# Altium PCB LCDTestor_CPLD.PcbDoc (part 2 of 2)
Units mil, origin at the board's own origin, x right, y up, seen from the top; angles counter-clockwise.
Board outline 5780 x 4745 mil, 2 copper layers (Top Layer, Bottom Layer); 142 components, 172 nets, 608 pads, 189 vias.
Unrouted connection lines stored in the file: 2.
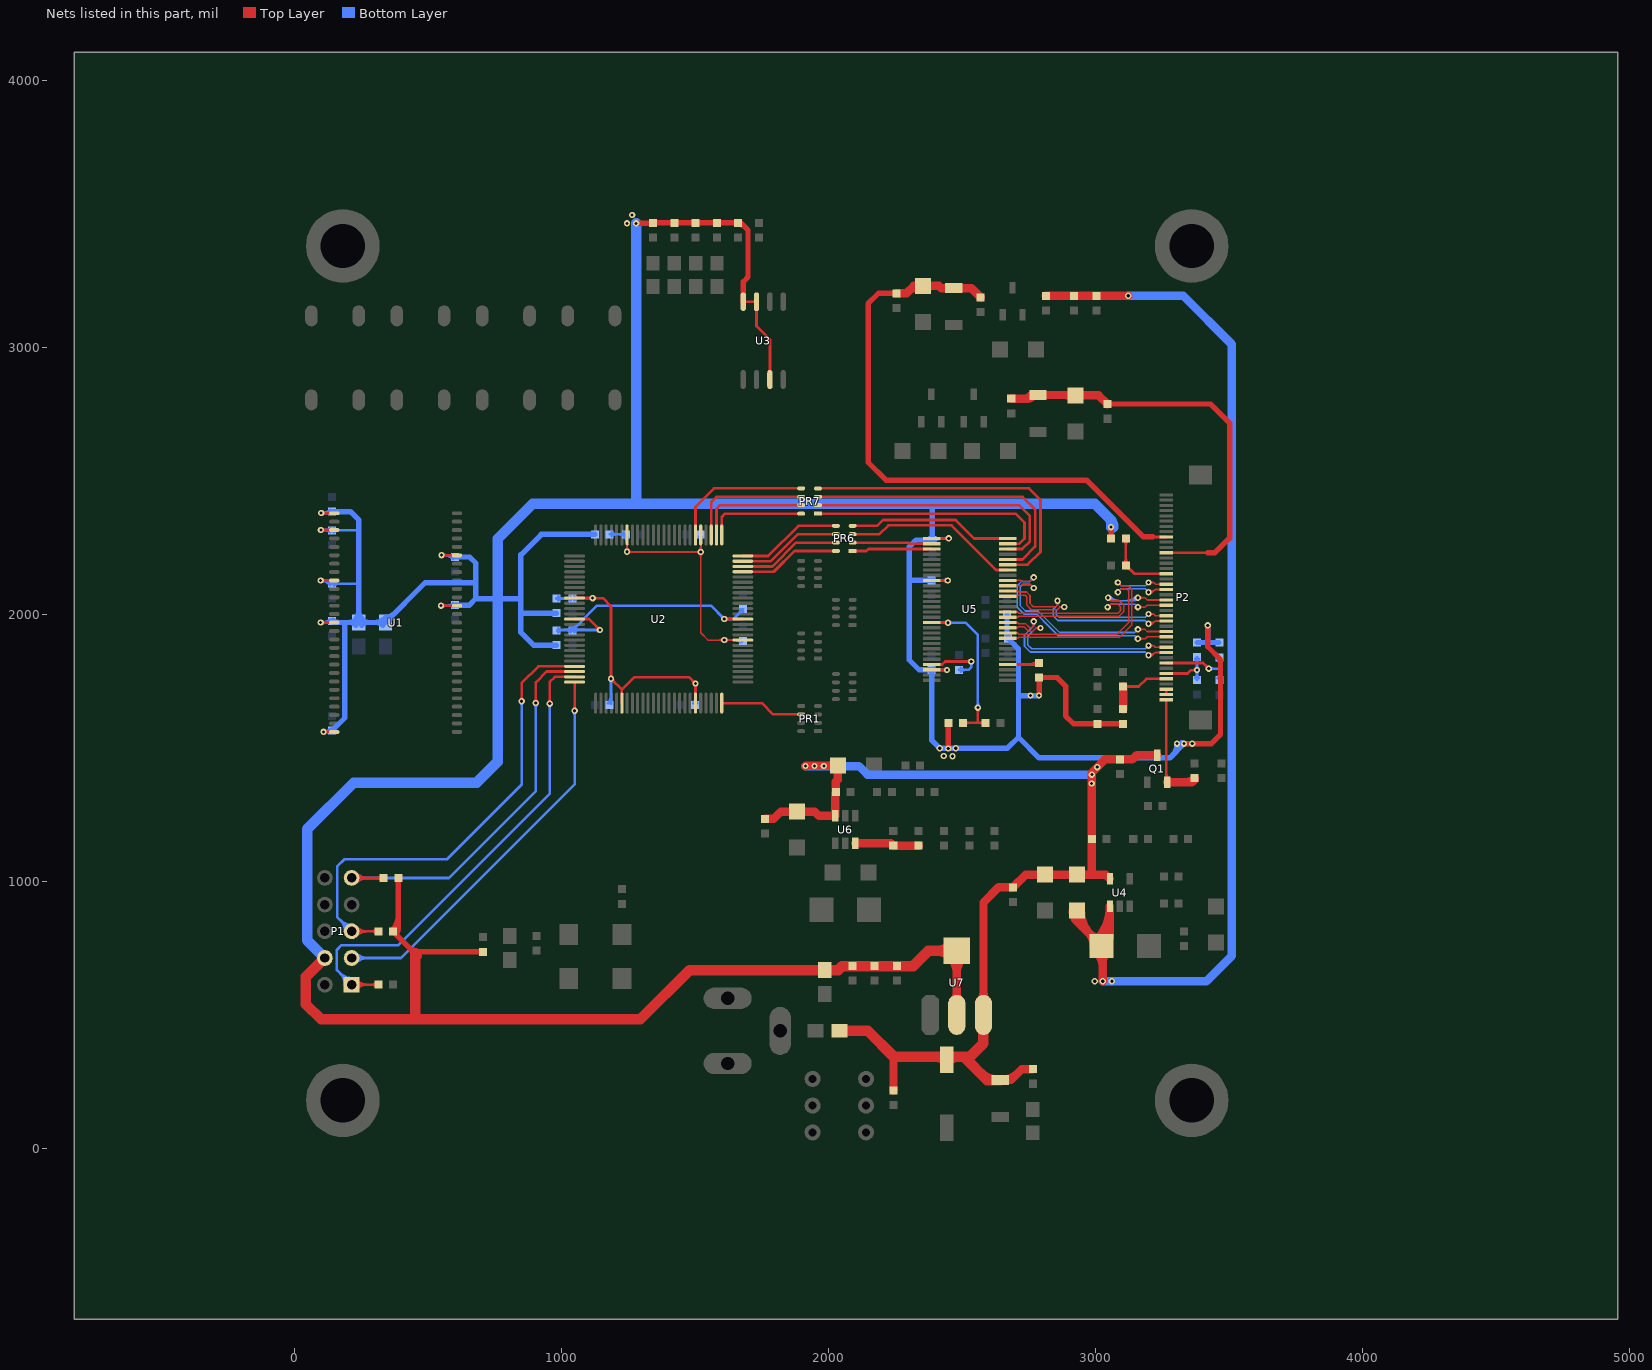
[diagram p2: the nets of this part, all layers, seen from the top]

## Via types
v1: diameter 23.62, hole 11.81, Top Layer to Bottom Layer, 165 vias
v2: diameter 50, hole 28, Top Layer to Bottom Layer, 24 vias

## Nets (pads, with @x,y where several pads share a name; then routed paths per layer and width w, separated by ;. In a path a pad name is that pad's centre, name@x,y a point inside that pad or via, vN(x,y) a via of type N, cw(c..) or ccw(c..) an arc to the next point about the centre after c; other vN are vias at no path point) (continued)
NetR35_2: R35.2 R43.1 U5.17 | length 785.9
  Top Layer w10: U5.17@2385.67,1969.79 2446.21,1969.79 v1(2447,1969) ; 2428.66,1969.79 cw(c2428.66,1950.66) v1@2442.18,1964.18 ; 2432.46,1969.79 ccw(c2432.46,1983.54) v1@2442.18,1973.82 ; R35.2@2503.39,1594 R43.1@2588.39,1594 ; R35.2@2510.46,1586.93 cw(c2527.53,1569.86) 2527.53,1594 cw(c2527.53,1618.14) R35.2@2510.46,1601.07 ; v1@2554.18,1646.18 cw(c2542.56,1634.56) 2559,1634.56 cw(c2575.44,1634.56) v1@2563.82,1646.18 ; 2559,1594 v1(2559,1651) ; R43.1@2581.31,1586.93 ccw(c2564.24,1569.86) 2564.24,1594 ccw(c2564.24,1618.14) R43.1@2581.31,1601.07
  Bottom Layer w10: v1(2447,1969) 2513,1969 2559,1923 v1(2559,1651) ; v1@2451.82,1964.18 cw(c2463.44,1952.56) 2463.44,1969 cw(c2463.44,1985.44) v1@2451.82,1973.82 ; v1@2554.18,1655.82 ccw(c2542.56,1667.44) 2559,1667.44 ccw(c2575.44,1667.44) v1@2563.82,1655.82
NetR36_2: R36.2 U5.25 | length 314.3
  Top Layer w10: U5.25@2385.67,1812.31 2425.31,1812.31 2437,1824 v1(2534,1824) ; v1@2529.18,1819.18 ccw(c2517.56,1807.56) 2517.56,1824 ccw(c2517.56,1840.44) v1@2529.18,1828.82
  Bottom Layer w10: R36.2@2488.39,1792.62 2524.62,1792.62 2534,1802 v1(2534,1824) ; R36.2@2495.46,1785.55 cw(c2512.53,1768.48) 2512.53,1792.62 cw(c2512.53,1816.76) R36.2@2495.46,1799.69 ; v1@2529.18,1819.18 cw(c2517.56,1807.56) 2534,1807.56 cw(c2550.44,1807.56) v1@2538.82,1819.18
NetR38_1: R38.1 R44.2 U6.3 | length 263.5
  Top Layer w31.5: U6.3@2099.4,1142.82 2233.18,1142.82 R44.2@2242,1134 R38.1@2337,1134 ; 2222.51,1142.82 cw(c2222.51,1114.51) R44.2@2242.53,1134.53
NetR46_2: R46.2 U5.32 | length 174.9
  Top Layer w10: U5.32@2671.1,1812.31 2781.69,1812.31 R46.2@2788.39,1819 cw(c2772.23,1835.16) 2772.23,1812.31 ; 2748.09,1812.31 ccw(c2748.09,1859.3) R46.2@2781.31,1826.07
R0: PR7.5 U2.81 | length 530.1
  Top Layer w10: U2.81@1501.14,2297.74 1501.14,2403.14 1570.07,2472.07 PR7.5@1897.24,2472.07
R1: PR7.6 U2.78 | length 468.3
  Top Layer w10: U2.78@1560.2,2297.74 1560.2,2420.81 1579.96,2440.57 1623.39,2440.57 PR7.6@1897.24,2440.57
R2: PR7.7 U2.77 | length 420.7
  Top Layer w10: U2.77@1579.88,2297.74 1579.88,2395.5 1593.46,2409.08 1633.39,2409.08 PR7.7@1897.24,2409.08
R3: PR7.8 U2.76 | length 370.1
  Top Layer w10: U2.76@1599.57,2297.74 1599.57,2365.18 1611.97,2377.58 1766.97,2377.58 PR7.8@1897.13,2377.58
R4: PR6.5 U2.75 | length 395.8
  Top Layer w10: U2.75@1678.31,2219 1773.39,2219 1886.46,2332.07 PR6.5@2027.24,2332.07
R5: PR6.8 U2.72 | length 381
  Top Layer w10: U2.72@1678.31,2159.94 1794.33,2159.94 1871.97,2237.58 PR6.8@2027.13,2237.58
R6: PR6.6 U2.74 | length 390.9
  Top Layer w10: U2.74@1678.31,2199.32 1783.7,2199.32 1884.96,2300.57 PR6.6@2027.24,2300.57
R7: PR6.7 U2.73 | length 386
  Top Layer w10: U2.73@1678.31,2179.63 1789.02,2179.63 1878.46,2269.08 PR6.7@2027.24,2269.08
R_0: PR7.4 U5.51 | length 1188.1
  Top Layer w10: PR7.4@1960.12,2472.07 2750.32,2472.07 2793.39,2429 2793.39,2234 2745.71,2186.32 U5.51@2671.1,2186.32
R_1: PR7.3 U5.52 | length 1094.7
  Top Layer w10: PR7.3@1960.12,2440.57 2726.81,2440.57 2773.39,2394 2773.39,2254 2725.39,2206.01 U5.52@2671.1,2206.01
R_2: PR7.2 U5.54 | length 999
  Top Layer w10: PR7.2@1960.12,2409.08 2713.31,2409.08 2753.39,2369 2753.39,2274 2724.76,2245.38 U5.54@2671.1,2245.38
R_3: PR7.1 U5.55 | length 917.3
  Top Layer w10: PR7.1@1960.12,2377.58 2699.8,2377.58 2733.39,2344 2733.39,2284 2714.45,2265.06 U5.55@2671.1,2265.06
R_4: PR6.4 U5.56 | length 618.8
  Top Layer w10: PR6.4@2090.12,2332.07 2181.46,2332.07 2203.39,2354 2476,2354 2545.25,2284.75 U5.56@2671.1,2284.75
R_5: PR6.1 U5.3 | length 298.8
  Top Layer w10: PR6.1@2090.12,2237.58 2141.97,2237.58 2149.76,2245.38 U5.3@2385.67,2245.38
R_6: PR6.3 U5.50 | length 664.2
  Top Layer w10: PR6.3@2090.12,2300.57 2189.96,2300.57 2223.39,2334 2460,2334 2627.36,2166.64 U5.50@2671.1,2166.64
R_7: PR6.2 U5.2 | length 297.2
  Top Layer w10: PR6.2@2090.12,2269.08 2298.31,2269.08 2302.32,2265.06 U5.2@2385.67,2265.06
RESET: C34.2 P2.5 R21.2 | length 296.3
  Top Layer w10: C34.2@3103,1730 3161,1730 3189.88,1758.88 P2.5@3264.41,1758.88 ; C34.2@3110.07,1722.93 cw(c3127.14,1705.86) 3127.14,1730 cw(c3127.14,1754.14) C34.2@3110.07,1737.07
  Top Layer w31.5: R21.2@3103,1645 C34.2@3103,1730
RXCLKIN_N: P2.10 U5.40 | length 911.3
  Top Layer w5.91: U5.40@2671.1,1969.79 2707.39,1969.79 2707.39,1969.04 2710.57,1965.85 2737.54,1965.85 2753.39,1950 2761.39,1950 2767.39,1956 2767.39,1973 v1(2768.39,1974) ; U5.40@2699.77,1967.7 cw(c2704.81,1962.66) 2704.81,1969.79 cw(c2704.81,1976.92) U5.40@2699.77,1971.87 ; v1@2762.36,1967.51 cw(c2751.64,1955.97) 2767.39,1955.97 cw(c2779.94,1955.97) v1@2773.17,1966.54 ; v1@3196.91,1844.4 ccw(c3203.38,1855.58) 3212.52,1846.44 ; v1(3198.39,1846.95) 3213.03,1846.95 3223.39,1857.31 ; v1@3199.87,1849.51 ccw(c3207.37,1862.45) 3217.95,1851.87 ; v1@3202.83,1854.62 ccw(c3211.36,1869.33) 3223.39,1857.31 ; P2.10@3242.64,1855.22 ccw(c3237.6,1850.18) 3237.6,1857.31 ccw(c3237.6,1864.43) P2.10@3242.64,1859.39 ; P2.10@3264.41,1857.31 3223.39,1857.31
  Top Layer w10: U5.40@2671.1,1969.79 U5.40@2671.1,1970.1
  Bottom Layer w5.91: v1@2763.44,1966.65 cw(c2757.17,1957.35) 2768.39,1957.35 ; v1(2768.39,1974) 2768.39,1957.35 ; v1@2773.33,1966.65 ccw(c2779.6,1957.35) 2768.39,1957.35 ; v1(3198.39,1846.95) 3186.14,1859.2 2755.49,1859.2 2733.75,1880.93 2733.75,1922.72 2768.39,1957.35
RXCLKIN_P: P2.11 U5.39 | length 854.2
  Top Layer w5.91: U5.39@2671.1,1950.1 2707.39,1950.1 2711.32,1954.04 2731.35,1954.04 2737.39,1948 2748.39,1937 2765.39,1937 2777.39,1949 ; U5.39@2699.77,1948.01 cw(c2704.81,1942.97) 2704.81,1950.1 cw(c2704.81,1957.23) U5.39@2699.77,1952.19 ; v1@2785.88,1944.3 ccw(c2777.39,1938.98) 2777.39,1949 ; v1@2785.88,1953.7 cw(c2777.39,1959.02) 2777.39,1949 ; v1(2793.39,1949) 2777.39,1949 ; v1(3198.39,1883.25) 3217.44,1883.25 ; v1@3205.16,1877.54 cw(c3217.44,1867.19) 3217.44,1883.25 ; v1@3205.16,1888.96 ccw(c3217.44,1899.31) 3217.44,1883.25 ; P2.11@3242.64,1874.9 ccw(c3237.6,1869.86) 3237.6,1876.99 ccw(c3237.6,1884.12) P2.11@3242.64,1879.08 ; P2.11@3264.41,1876.99 3223.7,1876.99 3217.44,1883.25
  Top Layer w10: P2.11@3264.41,1876.99 P2.11@3264.41,1877.31
  Bottom Layer w5.91: v1@2786.04,1944.05 ccw(c2776.74,1937.79) 2776.74,1949 ; v1@2786.04,1953.95 cw(c2776.74,1960.21) 2776.74,1949 ; v1(2793.39,1949) 2776.74,1949 ; v1(3198.39,1883.25) 3186.14,1871.01 2760.38,1871.01 2745.56,1885.82 2745.56,1917.82 2776.74,1949
RXIN0_N: P2.13 U5.48 | length 962.6
  Top Layer w5.91: U5.48@2671.1,2127.27 2720.12,2127.27 2723.39,2124 2753.39,2124 v1(2768.39,2139) ; U5.48@2699.77,2125.18 cw(c2704.81,2120.14) 2704.81,2127.27 cw(c2704.81,2134.4) U5.48@2699.77,2129.36 ; v1(3158.39,1909) 3186.34,1909 3193.7,1916.36 P2.13@3264.41,1916.36 ; v1@3164.65,1902.74 cw(c3179.77,1887.61) 3179.77,1909 cw(c3179.77,1930.39) v1@3164.65,1915.26 ; P2.13@3242.64,1914.27 ccw(c3237.6,1909.23) 3237.6,1916.36 ccw(c3237.6,1923.49) P2.13@3242.64,1918.45
  Top Layer w10: U5.48@2671.1,2127.27 U5.48@2671.1,2127.58 ; P2.13@3264.41,1916.05 P2.13@3264.41,1916.36
  Bottom Layer w5.91: v1@2759.53,2139 cw(c2738.14,2139) 2753.26,2123.88 cw(c2768.39,2108.76) v1@2768.39,2130.14 ; v1(2768.39,2139) 2752.39,2123 2726.57,2123 2727.39,2123.81 2722.49,2123.81 2706.57,2107.89 2706.57,2027.11 2733.03,2000.65 2780.03,2000.65 2826.57,1954.11 2860.09,1920.59 3146.79,1920.59 v1(3158.39,1909)
RXIN0_P: P2.14 U5.47 | length 886
  Top Layer w5.91: U5.47@2671.1,2107.58 2719.97,2107.58 2724.39,2112 2755.39,2112 v1(2768.39,2099) ; U5.47@2699.77,2105.5 cw(c2704.81,2100.45) 2704.81,2107.58 cw(c2704.81,2114.71) U5.47@2699.77,2109.67 ; v1(3158.39,1944) 3185.43,1944 3193.39,1936.05 P2.14@3264.41,1936.05 ; v1@3164.65,1937.74 cw(c3179.77,1922.61) 3179.77,1944 cw(c3179.77,1965.39) v1@3164.65,1950.26 ; P2.14@3242.64,1933.96 ccw(c3237.6,1928.92) 3237.6,1936.05 ccw(c3237.6,1943.17) P2.14@3242.64,1938.13
  Bottom Layer w5.91: v1(2768.39,2099) 2755.39,2112 2727.39,2112 2718.39,2103 2718.39,2032 2737.39,2013 2784.39,2013 2864.98,1932.41 3146.79,1932.41 v1(3158.39,1944)
RXIN1_N: P2.16 U5.46 | length 877.7
  Top Layer w5.91: U5.46@2697.49,2087.9 U5.46@2671.1,2087.9 2707.39,2087.9 2711.32,2083.96 2741.28,2083.96 2754.2,2071.04 2754.2,2041.19 2766.39,2029 2851.39,2029 2857.39,2035 ; U5.46@2699.77,2085.81 cw(c2704.81,2080.77) 2704.81,2087.9 cw(c2704.81,2095.03) U5.46@2699.77,2089.99 ; v1@2852.68,2043.49 cw(c2847.37,2035) 2857.39,2035 ; v1(2857.39,2051) 2857.39,2035 ; v1@2862.09,2043.49 ccw(c2867.4,2035) 2857.39,2035 ; v1@3196.91,1962.51 ccw(c3203.38,1973.69) 3212.52,1964.55 ; v1(3198.39,1965.06) 3213.03,1965.06 3223.39,1975.42 ; v1@3199.87,1967.62 ccw(c3207.37,1980.56) 3217.95,1969.98 ; v1@3202.83,1972.73 ccw(c3211.36,1987.44) 3223.39,1975.42 ; P2.16@3242.64,1973.33 ccw(c3237.6,1968.29) 3237.6,1975.42 ccw(c3237.6,1982.54) P2.16@3242.64,1977.5 ; P2.16@3264.41,1975.42 3223.39,1975.42
  Top Layer w10: U5.46@2671.1,2087.9 U5.46@2671.1,2088.21
  Bottom Layer w5.91: v1(2857.39,2051) 2857.39,2035.33 2841.22,2019.17 2841.22,1994.46 2858.38,1977.31 3186.14,1977.31 v1(3198.39,1965.06)
RXIN1_P: P2.17 U5.45 | length 783.1
  Top Layer w5.91: U5.45@2671.1,2068.21 2707.39,2068.21 2711.32,2072.15 2736.39,2072.15 2742.39,2066.15 2742.39,2035 2759.39,2018 2857.39,2018 2867.39,2028 v1(2882.39,2028) v1@2881.53,2027.14 ; U5.45@2699.77,2066.13 cw(c2704.81,2061.08) 2704.81,2068.21 cw(c2704.81,2075.34) U5.45@2699.77,2070.3 ; v1(3198.39,2001.36) 3217.44,2001.36 ; v1@3205.16,1995.65 cw(c3217.44,1985.3) 3217.44,2001.36 ; v1@3205.16,2007.07 ccw(c3217.44,2017.42) 3217.44,2001.36 ; P2.17@3242.64,1993.01 ccw(c3237.6,1987.97) 3237.6,1995.1 ccw(c3237.6,2002.23) P2.17@3242.64,1997.19 ; P2.17@3264.41,1995.1 3223.7,1995.1 3217.44,2001.36
  Top Layer w10: P2.17@3264.41,1995.1 P2.17@3264.41,1995.42
  Bottom Layer w5.91: v1(2882.39,2028) 2866.76,2028 2853.07,2014.31 2853.07,2000.02 2852.72,1999.67 2863.27,1989.12 3186.14,1989.12 v1(3198.39,2001.36)
RXIN2_N: P2.19 U5.42 | length 787.8
  Top Layer w5.91: U5.42@2671.1,2009.16 2708.39,2009.16 2712.32,2005.22 3084.61,2005.22 3093.39,2014 3093.39,2029 3083.39,2039 3056.56,2039.02 v1(3044.96,2027.43) ; U5.42@2699.77,2007.07 cw(c2704.81,2002.03) 2704.81,2009.16 cw(c2704.81,2016.29) U5.42@2699.77,2011.24 ; v1(3158.39,2027.43) 3186.34,2027.43 3193.39,2034.47 P2.19@3264.41,2034.47 ; v1@3164.65,2021.16 cw(c3179.77,2006.04) 3179.77,2027.43 cw(c3179.77,2048.81) v1@3164.65,2033.69 ; P2.19@3242.64,2032.38 ccw(c3237.6,2027.34) 3237.6,2034.47 ccw(c3237.6,2041.6) P2.19@3242.64,2036.56
  Top Layer w10: P2.19@3264.41,2034.47 P2.19@3264.41,2034.79
  Bottom Layer w5.91: v1(3044.96,2027.43) 3056,2038.46 3147.35,2038.46 v1(3158.39,2027.43)
RXIN2_P: P2.20 U5.41 | length 1023.9
  Top Layer w5.91: U5.41@2671.1,1989.47 2708.39,1989.47 2712.32,1993.41 3087.79,1993.41 3105.2,2010.81 3105.2,2034.02 3088.39,2050.83 3058.41,2050.83 v1(3046.81,2062.43) ; U5.41@2699.77,1987.38 cw(c2704.81,1982.34) 2704.81,1989.47 cw(c2704.81,1996.6) U5.41@2699.77,1991.56 ; v1(3158.39,2062.43) 3185.43,2062.43 3193.7,2054.16 P2.20@3264.41,2054.16 ; v1@3164.65,2056.16 cw(c3179.77,2041.04) 3179.77,2062.43 cw(c3179.77,2083.81) v1@3164.65,2068.69 ; P2.20@3242.64,2052.07 ccw(c3237.6,2047.03) 3237.6,2054.16 ccw(c3237.6,2061.28) P2.20@3242.64,2056.24
  Top Layer w10: U5.41@2671.1,1989.16 U5.41@2671.1,1989.47 ; P2.20@3264.41,2054.16 P2.20@3264.41,2054.47
  Bottom Layer w5.91: v1@3044.72,2060.34 ccw(c3064.85,2080.46) 3064.85,2052 ; v1(3046.81,2062.43) 3057.24,2052 3147.96,2052 v1(3158.39,2062.43) ; v1@3048.9,2064.51 ccw(c3079.11,2094.72) 3079.11,2052 ; v1@3053.07,2068.69 ccw(c3093.36,2108.98) 3093.36,2052 ; 3111.83,2052 ccw(c3111.83,2108.98) v1@3152.12,2068.69 ; 3126.09,2052 ccw(c3126.09,2094.72) v1@3156.3,2064.51 ; 3140.35,2052 ccw(c3140.35,2080.46) v1@3160.47,2060.34
RXIN3_N: P2.22 U5.38 | length 916.7
  Top Layer w5.91: U5.38@2671.1,1930.42 2708.39,1930.42 2712.32,1926.48 3080.87,1926.48 3123.39,1969 3123.39,2089 3116.97,2095.42 3095.63,2095.42 v1(3083.39,2083.17) ; U5.38@2699.77,1928.33 cw(c2704.81,1923.29) 2704.81,1930.42 cw(c2704.81,1937.55) U5.38@2699.77,1932.5 ; v1@3196.91,2080.62 ccw(c3203.38,2091.8) 3212.52,2082.66 ; v1(3198.39,2083.17) 3213.03,2083.17 3223.39,2093.53 ; v1@3199.87,2085.73 ccw(c3207.37,2098.67) 3217.95,2088.09 ; v1@3202.83,2090.84 ccw(c3211.36,2105.55) 3223.39,2093.53 ; P2.22@3242.64,2091.44 ccw(c3237.6,2086.4) 3237.6,2093.53 ccw(c3237.6,2100.65) P2.22@3242.64,2095.61 ; P2.22@3264.41,2093.53 3223.39,2093.53
  Top Layer w10: U5.38@2671.1,1930.42 U5.38@2671.1,1930.73
  Bottom Layer w5.91: v1(3083.39,2083.17) 3096.21,2096 3185.56,2096 v1(3198.39,2083.17)
RXIN3_P: P2.23 U5.37 | length 925.3
  Top Layer w5.91: U5.37@2671.1,1910.73 2708.39,1910.73 2712.32,1914.67 3089.05,1914.67 3135.2,1960.81 3135.2,2094 3121.97,2107.23 3095.63,2107.23 v1(3083.39,2119.47) ; U5.37@2699.77,1908.64 cw(c2704.81,1903.6) 2704.81,1910.73 cw(c2704.81,1917.86) U5.37@2699.77,1912.82 ; v1(3198.39,2119.47) 3217.91,2119.47 ; v1@3205.05,2113.64 cw(c3217.91,2102.38) 3217.91,2119.47 ; v1@3205.05,2125.31 ccw(c3217.91,2136.56) 3217.91,2119.47 ; P2.23@3242.64,2111.12 ccw(c3237.6,2106.08) 3237.6,2113.21 ccw(c3237.6,2120.34) P2.23@3242.64,2115.3 ; P2.23@3264.41,2113.21 3224.17,2113.21 3217.91,2119.47
  Top Layer w10: P2.23@3264.41,2113.21 P2.23@3264.41,2113.53
  Bottom Layer w5.91: v1(3083.39,2119.47) 3094.86,2108 3186.91,2108 v1(3198.39,2119.47)
SELB: P2.25 R31.2 R33.1 | length 377.8
  Top Layer w10: R33.1@3106.31,2191.07 ccw(c3089.24,2208.14) 3113.39,2208.14 ccw(c3137.53,2208.14) R33.1@3120.46,2191.07 ; R31.2@3106.31,2276.93 cw(c3089.24,2259.86) 3113.39,2259.86 cw(c3137.53,2259.86) R31.2@3120.46,2276.93 ; R33.1@3113.39,2174 cw(c3113.39,2149.86) 3130.46,2166.93 cw(c3147.53,2184) R33.1@3123.39,2184 ; R31.2@3113.39,2284 R33.1@3113.39,2184 3144.8,2152.58 P2.25@3264.41,2152.58
STBYB: P2.8 R23.1 R30.2 | length 420.2
  Top Layer w10: P2.8@3264.41,1817.94 3403.06,1817.94 v1(3424,1797) ; v1@3417.19,1797 ccw(c3400.75,1797) 3412.37,1808.63 ccw(c3424,1820.25) v1@3424,1803.81
  Bottom Layer w10: v1(3424,1797) 3463.39,1797 ; v1@3428.82,1792.18 cw(c3440.44,1780.56) 3440.44,1797 cw(c3440.44,1813.44) v1@3428.82,1801.82 ; R30.2@3456.31,1761.07 ccw(c3439.24,1778.14) 3463.39,1778.14 ccw(c3487.53,1778.14) R30.2@3470.46,1761.07 ; R23.1@3456.31,1831.93 cw(c3439.24,1814.86) 3463.39,1814.86 cw(c3487.53,1814.86) R23.1@3470.46,1831.93 ; R30.2@3463.39,1754 3463.39,1797 ; R23.1@3463.39,1839 3463.39,1797
SW: C23.2 C30.1 C36.1 D3.1 L3.2 U4.1@3053.6,906.82 | length 4755.3
  Top Layer w31.5: C36.1@2814,3193 C30.1@2919,3193 C23.2@3004,3193 3121,3193 v1(3122,3194) ; L3.2@2913.76,890.5 ccw(c2971.31,890.5) 2930.61,849.8 ; L3.2@2931,890.5 2931,849.42 D3.1@3022.42,758 D3.1@3026.71,762.29 ; L3.2@2945.25,890.5 ccw(c3078.84,890.5) D3.1@2984.38,796.04 ; D3.1@2992.89,758 ccw(c2921.6,758) 2972.01,808.41 ccw(c3022.42,858.81) D3.1@3022.42,787.53 ; D3.1@3001.54,737.12 cw(c2940.07,675.65) 3027,675.65 ; D3.1@3001.54,778.88 ccw(c2875.85,904.56) U4.1@3053.6,904.56 ; D3.1@3023.81,756.61 ccw(c2951.89,828.53) 3053.6,828.53 ; v1(3027,626) 3027,762 D3.1@3026.71,762.29 ; 3027,697.78 cw(c3082.64,697.78) D3.1@3043.3,737.12 ; U4.1@3053.6,906.82 3053.6,789.18 D3.1@3026.71,762.29 ; 2931,856.09 cw(c2965.41,856.09) 2941.08,880.42 ccw(c2965.41,856.09) 2931,856.09 ; 2931,856.09 ccw(c2896.59,856.09) 2920.92,880.42 cw(c2896.59,856.09) 2931,856.09
  Bottom Layer w31.5: v1(3027,626) 3415,626 3510,721 3510,3012 3328,3194 v1(3122,3194)
  other v1: 2997,626 3061,626
TCK: P1.1 R14.2 U2.24 | length 2198.8
  Top Layer w10: P1.1@213,613 R14.2@313,613 ; P1.1@223.27,602.73 cw(c248.07,577.93) 248.07,613 cw(c248.07,648.07) P1.1@223.27,623.27 ; P1.1@230.34,595.66 cw(c272.21,553.79) 272.21,613 cw(c272.21,672.21) P1.1@230.34,630.34 ; R14.2@305.93,605.93 ccw(c288.86,588.86) 288.86,613 ccw(c288.86,637.14) R14.2@305.93,620.07 ; v1@950.18,1670.82 ccw(c938.56,1682.44) 955,1682.44 ccw(c971.44,1682.44) v1@959.82,1670.82 ; v1(955,1666) 955,1747 974.24,1766.24 U2.24@1048.39,1766.24
  Bottom Layer w10: P1.1@188.47,613 ccw(c129.26,613) 171.13,654.87 ccw(c213,696.74) P1.1@213,637.53 ; P1.1@198.47,613 ccw(c163.4,613) 188.2,637.8 ccw(c213,662.6) P1.1@213,627.53 ; P1.1@213,613 158,668 158,744 175,761 388,761 955,1328 v1(955,1666) ; v1@950.18,1661.18 cw(c938.56,1649.56) 955,1649.56 cw(c971.44,1649.56) v1@959.82,1661.18
TDI: P1.9 R13.2 U2.23 | length 1899.8
  Top Layer w10: P1.9@213,1013 R13.2@333,1013 ; P1.9@223.27,1002.73 cw(c248.07,977.93) 248.07,1013 cw(c248.07,1048.07) P1.9@223.27,1023.27 ; P1.9@230.34,995.66 cw(c272.21,953.79) 272.21,1013 cw(c272.21,1072.21) P1.9@230.34,1030.34 ; R13.2@325.93,1005.93 ccw(c308.86,988.86) 308.86,1013 ccw(c308.86,1037.14) R13.2@325.93,1020.07 ; v1@898.18,1672.82 ccw(c886.56,1684.44) 903,1684.44 ccw(c919.44,1684.44) v1@907.82,1672.82 ; v1(903,1668) 903,1745 943.93,1785.93 U2.23@1048.39,1785.93
  Bottom Layer w10: P1.9@213,1013 578,1013 903,1338 v1(903,1668) ; P1.9@223.27,1002.73 cw(c248.07,977.93) 248.07,1013 cw(c248.07,1048.07) P1.9@223.27,1023.27 ; P1.9@230.34,995.66 cw(c272.21,953.79) 272.21,1013 cw(c272.21,1072.21) P1.9@230.34,1030.34 ; v1@898.18,1663.18 cw(c886.56,1651.56) 903,1651.56 cw(c919.44,1651.56) v1@907.82,1663.18
TDO: P1.3 U2.25 | length 1687.7
  Top Layer w10: v1@1043.57,1644.2 ccw(c1031.94,1655.83) 1048.39,1655.83 ccw(c1064.83,1655.83) v1@1053.2,1644.2 ; v1(1048.39,1639.39) U2.25@1048.39,1746.56
  Bottom Layer w10: P1.3@213,713 398,713 1048.39,1363.39 v1(1048.39,1639.39) ; P1.3@223.27,702.73 cw(c248.07,677.93) 248.07,713 cw(c248.07,748.07) P1.3@223.27,723.27 ; P1.3@230.34,695.66 cw(c272.21,653.79) 272.21,713 cw(c272.21,772.21) P1.3@230.34,730.34 ; v1@1043.57,1634.57 cw(c1031.94,1622.94) 1048.39,1622.94 cw(c1064.83,1622.94) v1@1053.2,1634.57
TMS: P1.5 R12.2 U2.22 | length 2174.2
  Top Layer w10: P1.5@213,813 R12.2@313,813 ; P1.5@223.27,802.73 cw(c248.07,777.93) 248.07,813 cw(c248.07,848.07) P1.5@223.27,823.27 ; P1.5@230.34,795.66 cw(c272.21,753.79) 272.21,813 cw(c272.21,872.21) P1.5@230.34,830.34 ; R12.2@305.93,805.93 ccw(c288.86,788.86) 288.86,813 ccw(c288.86,837.14) R12.2@305.93,820.07 ; v1@845.18,1679.82 ccw(c833.56,1691.44) 850,1691.44 ccw(c866.44,1691.44) v1@854.82,1679.82 ; v1(850,1675) 850,1743 912.61,1805.61 U2.22@1048.39,1805.61
  Bottom Layer w10: P1.5@188.47,813 ccw(c129.26,813) 171.13,854.87 ccw(c213,896.74) P1.5@213,837.53 ; P1.5@198.47,813 ccw(c163.4,813) 188.2,837.8 ccw(c213,862.6) P1.5@213,827.53 ; P1.5@213,813 159,867 159,1056 186,1083 571,1083 850,1362 v1(850,1675) ; v1@845.18,1670.18 cw(c833.56,1658.56) 850,1658.56 cw(c866.44,1658.56) v1@854.82,1670.18
U/D: P2.6 R22.2 R29.1 | length 362.1
  Top Layer w10: P2.6@3264.41,1778.57 3316.57,1778.57 ; 3317,1779 3316.57,1778.57 ; 3361.14,1791 ccw(c3361.14,1810.86) v1@3375.18,1796.82 ; 3365.97,1791 cw(c3365.97,1777.97) v1@3375.18,1787.18 ; v1(3380,1792) 3381,1791 3357,1791 3344.57,1778.57 3316.57,1778.57
  Bottom Layer w10: R29.1@3372.93,1762.07 ccw(c3355.86,1779.14) 3380,1779.14 ccw(c3404.14,1779.14) R29.1@3387.07,1762.07 ; R22.2@3372.93,1832.93 cw(c3355.86,1815.86) 3380,1815.86 cw(c3404.14,1815.86) R22.2@3387.07,1832.93 ; v1@3375.18,1787.18 cw(c3363.56,1775.56) 3380,1775.56 cw(c3396.44,1775.56) v1@3384.82,1787.18 ; v1@3375.18,1796.82 ccw(c3363.56,1808.44) 3380,1808.44 ccw(c3396.44,1808.44) v1@3384.82,1796.82 ; R29.1@3380,1755 R22.2@3380,1840
VCC3.3: C11.1 C12.1 C13.1 C14.1 C15.1 C16.1 C17.1 C18.1 C19.2 C20.2 C21.2 C43.1 C45.2 C46.2 C47.2 L1.2 L2.2 P1.4 R1.1 R2.1 R3.1 R4.2 R6.1 R8.1 R9.1 R10.1 R12.1 R13.1 R20.2 R21.1 R22.1 R23.2 R31.1 R35.1 R46.1 U1.1 U1.3 U1.9 U1.14 U1.27 U1.43 U1.49 U3.3 U3.7 U3.8 U5.1 U5.9 U5.26 U7.2 U7.4 XC1.1 XC2.1 | length 20682.1
  Top Layer w10: v1(97,1970) 97.45,1969.55 U1.14@148.39,1969.55 ; v1(97,2127) U1.9@148.39,2127.03 ; v1(98,2316) U1.3@148.39,2316.01 ; v1(99,2380) 100,2379 U1.1@148.39,2379 ; v1@101.82,1965.18 cw(c112.36,1954.64) 112.36,1969.55 ; v1@101.82,1974.82 ccw(c114.53,1987.53) 114.53,1969.55 ; v1@101.82,2122.18 cw(c113.44,2110.56) 113.44,2127 cw(c113.44,2143.44) v1@101.82,2131.82 ; v1@102.82,2311.18 cw(c114.46,2299.54) 114.46,2316.01 ; v1@102.82,2320.82 ccw(c114.42,2332.42) 114.42,2316.01 ; v1@103.82,2375.18 cw(c113.03,2365.97) 113.03,2379 ; v1@103.82,2384.82 ccw(c117.86,2398.86) 117.86,2379 ; v1(108,1560) 108.1,1560.1 U1.27@148.39,1560.1 ; v1@112.82,1555.18 cw(c124.69,1543.31) 124.69,1560.1 ; v1@112.82,1564.82 ccw(c124.2,1576.2) 124.2,1560.1 ; v1(548,2033) 548.46,2032.54 U1.43@607.83,2032.54 ; v1(550,2222) 550.48,2221.52 U1.49@607.83,2221.52 ; v1@552.82,2028.18 cw(c563.34,2017.66) 563.34,2032.54 ; v1@552.82,2037.82 ccw(c565.55,2050.55) 565.55,2032.54 ; v1@554.82,2217.18 cw(c565.28,2206.72) 565.28,2221.52 ; v1@554.82,2226.82 ccw(c567.6,2239.6) 567.6,2221.52 ; U3.8@1680,3171.34 U3.7@1730,3171.34 1730,3080 1780,3030 U3.3@1780,2880 ; U3.8@1683.54,3167.8 cw(c1692.07,3159.27) 1692.07,3171.34 cw(c1692.07,3183.41) U3.8@1683.54,3174.87 ; U3.7@1726.46,3142.37 cw(c1717.93,3133.83) 1730,3133.83 cw(c1742.07,3133.83) U3.7@1733.54,3142.37 ; U3.7@1726.46,3167.8 ccw(c1717.93,3159.27) 1717.93,3171.34 ccw(c1717.93,3183.41) U3.7@1726.46,3174.87 ; U3.3@1776.46,2908.97 ccw(c1767.93,2917.5) 1780,2917.5 ccw(c1792.07,2917.5) U3.3@1783.54,2908.97 ; U5.26@2385.67,1792.62 2442.38,1792.62 v1(2443,1792) ; U5.9@2385.67,2127.27 v1(2446.27,2127.27) ; U5.1@2385.67,2284.75 2449.75,2284.75 v1(2450,2285) ; 2425.06,1792.62 cw(c2425.06,1774.06) v1@2438.18,1787.18 ; 2428.06,1792.62 ccw(c2428.06,1806.94) v1@2438.18,1796.82 ; 2432.95,2284.75 ccw(c2432.95,2302.05) v1@2445.18,2289.82 ; 2434.17,2284.75 cw(c2434.17,2269.17) v1@2445.18,2280.18 ; v1@2441.45,2122.45 ccw(c2429.82,2110.82) 2429.82,2127.27 ccw(c2429.82,2143.71) v1@2441.45,2132.08
  Top Layer w20: R12.1@364.46,816.54 ccw(c307.64,873.36) 388,873.36 ; R12.1@378.61,802.39 ccw(c355.93,825.07) 388,825.07 ; R13.1@388,1013 388,833 R12.1@368,813 445,736 R4.2@706,736 ; v1(1279,3465) R10.1@1340,3465 ; 1325.1,3465 ccw(c1325.1,3483.9) R10.1@1338.46,3470.54 ; R10.1@1342,3467 R9.1@1422,3467 R8.1@1502,3467 R6.1@1582,3467 C18.1@1660,3467 1671,3467 1698,3440 1698,3264 1680,3246 U3.8@1680,3171.34 ; C18.1@1660,3462 cw(c1660,3423.37) 1687.31,3450.69 ; v1(2448,1498) 2448.39,1498.39 R35.1@2448.39,1594 ; v1(2788,1696) 2788.39,1696.39 R46.1@2788.39,1764 2856,1764 2888,1732 2888,1620 2918,1590 R20.2@3008,1590 R21.1@3103,1590 ; R31.1@3058,2284.39 v1(3058,2327) ; v1(3331,1516) 3434,1516 3468,1550 3468,1831 3420,1879 v1(3420,1959)
  Top Layer w31.5: 445,736 451,730 461.5,719.5 ; U7.4@2455.78,715.78 cw(c2397.31,657.31) 2480,657.31 cw(c2562.69,657.31) U7.4@2504.22,715.78 ; U7.2@2468.15,554.34 ccw(c2439.56,582.94) 2480,582.94 ccw(c2520.44,582.94) U7.2@2491.85,554.34 ; U7.2@2480,500 U7.4@2480,740
  Top Layer w39.37: P1.4@113,713 42,642 42,540 99,483 451,483 ; 451,730 451,483 ; U7.4@2458.56,718.56 ccw(c2406.81,666.81) 2406.81,740 ccw(c2406.81,813.19) U7.4@2458.56,761.44 ; U7.4@2480,740 2374,740 2317,683 C47.2@2256,683 C46.2@2172.25,683 C45.2@2088.5,683 2051,683 2036,668 C43.1@1986,668 1480,668 1295,483 451,483
  Bottom Layer w10: v1(97,1970) 135,1970 C11.1@140,1975 ; v1(98,2316) 139,2316 C14.1@140,2315 238,2315 ; v1(99,2380) 135,2380 C15.1@140,2385 ; v1@101.82,1965.18 cw(c113.44,1953.56) 113.44,1970 cw(c113.44,1986.44) v1@101.82,1974.82 ; v1@101.82,2122.18 cw(c113.44,2110.56) 113.44,2127 cw(c113.44,2143.44) v1@101.82,2131.82 ; v1@102.82,2311.18 cw(c114.44,2299.56) 114.44,2316 cw(c114.44,2332.44) v1@102.82,2320.82 ; v1@103.79,1970 ccw(c103.79,2011.21) C11.1@132.93,1982.07 ; v1@103.82,2375.18 cw(c115.44,2363.56) 115.44,2380 cw(c115.44,2396.44) v1@103.82,2384.82 ; v1@103.79,2380 ccw(c103.79,2421.21) C15.1@132.93,2392.07 ; v1@112.82,1555.18 cw(c124.44,1543.56) 124.44,1560 cw(c124.44,1576.44) v1@112.82,1564.82 ; 113.44,2316 cw(c113.44,2288.44) C14.1@132.93,2307.93 ; 116.55,2127 cw(c116.55,2098.08) C13.1@140,2115 ; 118.27,2316 ccw(c118.27,2336.73) C14.1@132.93,2322.07 ; C13.1@131.89,2109.15 ccw(c97,2083.98) v1(97,2127) 128,2127 C13.1@140,2115 ; C12.1@132.31,1571.4 cw(c108,1591.63) v1(108,1560) 135,1560 C12.1@140,1565 ; C13.1@147.07,2107.93 cw(c164.14,2090.86) 164.14,2115 cw(c164.14,2139.14) C13.1@147.07,2122.07 ; C14.1@147.07,2307.93 cw(c164.14,2290.86) 164.14,2315 cw(c164.14,2339.14) C14.1@147.07,2322.07 ; 240,2115 C13.1@140,2115 ; v1(548,2033) 598,2033 C17.1@600,2035 ; v1(550,2222) 593,2222 C16.1@600,2215 ccw(c583.1,2198.1) 583.1,2222 ; v1@552.82,2028.18 cw(c564.44,2016.56) 564.44,2033 cw(c564.44,2049.44) v1@552.82,2037.82 ; v1@554.82,2217.18 cw(c566.44,2205.56) 566.44,2222 cw(c566.44,2238.44) v1@554.82,2226.82 ; v1@558.96,2222 cw(c558.96,2173.96) C16.1@592.93,2207.93 ; 571.03,2033 ccw(c571.03,2063.97) C17.1@592.93,2042.07 ; 580.69,2033 cw(c580.69,2015.69) C17.1@592.93,2027.93 ; C21.2@2385.67,1792.62 2386.29,1792 v1(2443,1792) ; C20.2@2385.67,2127.27 v1(2446.27,2127.27) ; C21.2@2392.74,1785.55 cw(c2408.31,1769.98) 2408.31,1792 ; C21.2@2392.74,1799.69 ccw(c2411.31,1818.27) 2411.31,1792 ; C20.2@2392.74,2120.2 cw(c2409.81,2103.13) 2409.81,2127.27 cw(c2409.81,2151.41) C20.2@2392.74,2134.34 ; C19.2@2395.46,2271.93 cw(c2427.01,2240.37) 2427.01,2285 ; C19.2@2402.87,2285 ccw(c2402.87,2264.51) C19.2@2388.39,2279 2394.39,2285 v1(2450,2285) ; v1@2438.18,1787.18 ccw(c2426.56,1775.56) 2426.56,1792 ccw(c2426.56,1808.44) v1@2438.18,1796.82 ; v1@2441.45,2122.45 ccw(c2429.82,2110.82) 2429.82,2127.27 ccw(c2429.82,2143.71) v1@2441.45,2132.08 ; v1@2445.18,2280.18 ccw(c2433.56,2268.56) 2433.56,2285 ccw(c2433.56,2301.44) v1@2445.18,2289.82
  Bottom Layer w20: C12.1@140,1565 188,1613 188,1970 ; C11.1@140,1975 145,1970 188,1970 ; C15.1@140,2385 209,2385 240,2354 240,2115 XC1.1@240,1970 ; C11.1@143.54,1978.54 ccw(c164.14,1999.14) 164.14,1970 ; XC1.1@229.39,1959.39 ccw(c203.79,1933.79) 203.79,1970 ccw(c203.79,2006.21) XC1.1@229.39,1980.61 ; XC1.1@229.39,1985.61 ccw(c203.79,2011.21) 240,2011.21 ccw(c276.21,2011.21) XC1.1@250.61,1985.61 ; XC1.1@250.61,1959.39 cw(c276.21,1933.79) 276.21,1970 cw(c276.21,2006.21) XC1.1@250.61,1980.61 ; XC2.1@329.39,1959.39 ccw(c303.79,1933.79) 303.79,1970 ccw(c303.79,2006.21) XC2.1@329.39,1980.61 ; XC2.1@340,1990 ccw(c340,2038.28) 374.14,2004.14 ; XC2.1@355,1975 cw(c379.14,1975) XC2.1@362.07,1992.07 ; C17.1@600,2035 654,2035 678,2059 ; C16.1@600,2215 655,2215 678,2192 678,2119 ; 845,2059 760,2059 678,2059 ; R2.1@980,1885 895,1885 847,1933 847,2005 ; R1.1@980,2005 847,2005 ; R3.1@1125,2300 924,2300 847,2223 847,2005 ; C20.2@2384.94,2128 2302,2128 ; 2388.39,2408.39 C19.2@2388.39,2279 2328,2279 2302,2253 2302,2128 ; L1.2@2668.39,1913.45 L2.2@2668.39,1999 ; 2668.39,1929.36 ccw(c2689.73,1929.36) L1.2@2674.64,1914.27 ; L1.2@2671.1,1910.73 2711,1870.83 2711,1703 ; v1(2788,1696) 2718,1696 2711,1703 ; 3291,1476 ccw(c3259.62,1507.38) v1@3303.22,1515.66 ; 3317.74,1502.74 ccw(c3304.56,1515.92) v1@3322.87,1519.39 ; v1(3331,1516) 3278,1463 2788,1463 2711,1540 ; R22.1@3380,1895 3420,1895 ; v1(3420,1959) 3420,1895 ; R23.2@3462.39,1895 3420,1895 ; 188,1970 XC1.1@240,1970 ; XC1.1@240,1970 XC2.1@340,1970 489,2119 678,2119 ; 678,2059 678,2119 ; 2302,2128 2302,1830 2339.38,1792.62 C21.2@2385.67,1792.62 2385.67,1529.33 v1(2416,1499) 2670,1499 2711,1540 ; 2711,1540 2711,1703
  Bottom Layer w39.37: P1.4@113,713 46,780 46,1195 221,1370 681,1370 760,1449 760,2059 760,2283 891,2414 1280,2414 ; v1@1280,3465 1280,2414 ; 3053.06,2357.94 cw(c3022.11,2327) v1@3065.87,2327 ; v1(3058,2327) 3058,2353 2997,2414 1280,2414
  other v1: 2464,1469 2431,1470 2476,1499 3305,1516 3362,1516 2756,1696 1245,3465 1264,3496
VCC5V: C28.1 C29.2 C39.1 C40.2 C42.1 C44.2 D8.2 F1.2 L3.1 L4.1 Q1.3 R15.1 R16.1 R34.1 R37.1 U4.5 U6.6 U7.3 | length 5136.3
  Top Layer w31.5: C40.2@1762,1234 1794,1234 1821.5,1261.5 L4.1@1882,1261.5 1947.5,1261.5 1963.82,1245.18 U6.6@2024.6,1245.18 2024.6,1331.6 R34.1@2027,1334 2027,1374 2034.5,1381.5 C39.1@2034.5,1434 1915,1434 v1(1913,1432) ; L4.1@1871.92,1251.42 ccw(c1847.59,1227.09) 1847.59,1261.5 ccw(c1847.59,1295.91) L4.1@1871.92,1271.58 ; L4.1@1892.08,1251.42 cw(c1916.41,1227.09) 1916.41,1261.5 cw(c1916.41,1295.91) L4.1@1892.08,1271.58 ; C39.1@2024.42,1444.08 cw(c2000.09,1468.41) 2000.09,1434 cw(c2000.09,1399.59) 2024.42,1423.92 cw(c2000.09,1399.59) 2034.5,1399.59 cw(c2068.91,1399.59) C39.1@2044.58,1423.92 ; C44.2@2243,217 2243,344 ; U7.3@2568.15,554.34 ccw(c2539.56,582.94) 2580,582.94 ccw(c2620.44,582.94) U7.3@2591.85,554.34 ; U7.3@2576,496 U7.3@2580,500 2580,519 2580,921 2637,978 C29.2@2691,978 2738.5,1025.5 C28.1@2811,1025.5 L3.1@2931,1025.5 3037.28,1025.5 U4.5@3053.6,1009.18 ; D8.2@2643,255.9 2682.9,255.9 2724,297 R37.1@2765,297 ; D8.2@2656.78,258.85 ccw(c2656.78,329.03) 2706.41,279.41 ; C28.1@2800.92,1015.42 ccw(c2776.59,991.09) 2776.59,1025.5 ccw(c2776.59,1059.91) C28.1@2800.92,1035.58 ; C28.1@2821.08,1015.42 cw(c2845.41,991.09) 2845.41,1025.5 cw(c2845.41,1059.91) C28.1@2821.08,1035.58 ; L3.1@2920.92,1015.42 ccw(c2896.59,991.09) 2896.59,1025.5 ccw(c2896.59,1059.91) L3.1@2920.92,1035.58 ; L3.1@2941.08,1015.42 cw(c2965.41,991.09) 2965.41,1025.5 cw(c2965.41,1059.91) L3.1@2941.08,1035.58 ; 2986,1027.5 R16.1@2986,1158 ; R16.1@2986,1163 R16.1@2986,1158 ; Q1.3@3231,1473.18 3154.18,1473.18 3138,1457 R15.1@3091,1457 3035,1457 2986,1408 v1(2986,1400) R16.1@2986,1158
  Top Layer w39.37: F1.2@2040,440 2147,440 2243,344 2443,344 2506,344 ; 2401.2,344 cw(c2401.2,290.2) C42.1@2439.24,328.24 ; C42.1@2446.76,328.24 cw(c2484.8,290.2) 2484.8,344 ; 2570.95,279.05 ccw(c2629.22,337.32) D8.2@2629.22,254.91 ; U7.3@2580,500 2580,394 2530,344 2506,344 ; D8.2@2643,255.9 2594.1,255.9 2506,344
  Bottom Layer w31.5: v1(1913,1432) 2113,1432 2145,1400 v1(2986,1400)
  other v1: 2985,1367 3006,1428 1947,1432 1982,1432
VCCINT: C7.2 C8.2 R2.2 U2.13 U2.63 | length 1375
  Top Layer w10: U2.13@1048.39,1982.78 1102.22,1982.78 v1(1143,1942) ; v1@1136.19,1942 ccw(c1119.75,1942) 1131.37,1953.63 ccw(c1143,1965.25) v1@1143,1948.81 ; v1(1609,1983) 1609.22,1982.78 U2.63@1678.31,1982.78 ; v1@1613.82,1978.18 cw(c1624.91,1967.09) 1624.91,1982.78 ; v1@1613.82,1987.82 ccw(c1625.98,1999.98) 1625.98,1982.78
  Bottom Layer w10: R2.2@983,1940 985,1942 C7.2@1042,1942 ; R2.2@987.07,1932.93 cw(c1008.97,1911.03) 1008.97,1942 ; R2.2@987.07,1947.07 ccw(c999.31,1959.31) 999.31,1942 ; 1011.03,1942 cw(c1011.03,1911.03) C7.2@1032.93,1932.93 ; 1020.69,1942 ccw(c1020.69,1959.31) C7.2@1032.93,1947.07 ; C7.2@1040,1940 C7.2@1042,1942 ; C7.2@1040,1950 ccw(c1040,1974.14) 1057.07,1957.07 ccw(c1074.14,1940) C7.2@1050,1940 ; C7.2@1047.07,1932.93 cw(c1068.97,1911.03) 1068.97,1942 ; C7.2@1047.07,1947.07 ccw(c1059.31,1959.31) 1059.31,1942 ; v1@1138.18,1937.18 ccw(c1126.56,1925.56) 1126.56,1942 ccw(c1126.56,1958.44) v1@1138.18,1946.82 ; v1(1143,1942) C7.2@1042,1942 ; v1@1602.19,1983 ccw(c1585.75,1983) 1597.37,1994.63 ccw(c1609,2006.25) v1@1609,1989.81 ; v1@1613.82,1978.18 cw(c1625.44,1966.56) 1625.44,1983 cw(c1625.44,1999.44) v1@1613.82,1987.82 ; C8.2@1670,2020 cw(c1645.86,2020) 1662.93,2002.93 cw(c1680,1985.86) C8.2@1680,2010 ; C8.2@1680,2020 1643,1983 v1(1609,1983) 1559,2033 1133,2033 C7.2@1042,1942
VCCIO1: C1.2 C2.2 C3.2 R1.2 U2.9 U2.31 U2.45 | length 1634.9
  Top Layer w10: U2.9@1048.39,2061.52 1115.48,2061.52 v1(1116,2061) 1154,2061 1185,2030 v1(1185,1759) 1225.55,1718.45 ; 1098.3,2061.52 cw(c1098.3,2043.3) v1@1111.18,2056.18 ; 1100.81,2061.52 ccw(c1100.81,2076.19) v1@1111.18,2065.82 ; v1@1120.82,2056.18 cw(c1132.44,2044.56) 1132.44,2061 cw(c1132.44,2077.44) v1@1120.82,2065.82 ; v1@1180.18,1763.82 ccw(c1168.56,1775.44) 1185,1775.44 ccw(c1201.44,1775.44) v1@1189.82,1763.82 ; v1@1185,1752.19 cw(c1185,1735.75) 1196.63,1747.37 cw(c1208.25,1759) v1@1191.81,1759 ; U2.31@1225.55,1667.82 1225.55,1718.45 ; v1@1494.19,1741 ccw(c1477.75,1741) 1489.37,1752.63 ccw(c1501,1764.25) v1@1501,1747.81 ; v1@1496.18,1736.18 cw(c1484.21,1724.21) 1501.14,1724.21 ; U2.45@1501.14,1667.82 1501.14,1740.86 v1(1501,1741) 1477,1765 1272.1,1765 1225.55,1718.45 ; 1501.14,1724.9 cw(c1517.1,1724.9) v1@1505.82,1736.18
  Bottom Layer w10: R1.2@980,2060 C1.2@1040,2060 1041,2061 v1(1116,2061) ; R1.2@987.07,2052.93 cw(c1004.14,2035.86) 1004.14,2060 cw(c1004.14,2084.14) R1.2@987.07,2067.07 ; C1.2@1032.93,2052.93 ccw(c1015.86,2035.86) 1015.86,2060 ccw(c1015.86,2084.14) C1.2@1032.93,2067.07 ; C1.2@1047.07,2052.93 cw(c1066.56,2033.44) 1066.56,2061 ; C1.2@1047.07,2067.07 ccw(c1061.73,2081.73) 1061.73,2061 ; v1@1111.18,2056.18 ccw(c1099.56,2044.56) 1099.56,2061 ccw(c1099.56,2077.44) v1@1111.18,2065.82 ; C2.2@1172.93,1667.07 ccw(c1143.79,1696.21) 1185,1696.21 ; v1@1180.18,1754.18 cw(c1168.56,1742.56) 1185,1742.56 cw(c1201.44,1742.56) v1@1189.82,1754.18 ; C2.2@1185,1665 v1(1185,1759) ; C3.2@1492.93,1667.07 ccw(c1473.44,1686.56) 1501,1686.56 ; v1@1496.18,1736.18 cw(c1484.56,1724.56) 1501,1724.56 cw(c1517.44,1724.56) v1@1505.82,1736.18 ; C3.2@1500,1660 1501,1661 v1(1501,1741) ; 1501,1681.73 ccw(c1521.73,1681.73) C3.2@1507.07,1667.07
VCCIO2: C4.2 C5.2 C6.2 R3.2 U2.59 U2.80 U2.94 | length 1781.4
  Top Layer w5.91: v1@1238.74,2241.26 ccw(c1223.04,2256.96) 1245.24,2256.96 ; U2.94@1243.29,2262.13 cw(c1238.58,2257.43) 1245.24,2257.43 cw(c1251.89,2257.43) U2.94@1247.18,2262.13 ; v1(1245,2235) 1245.24,2235.24 U2.94@1245.24,2297.74 ; 1245.24,2255.82 ccw(c1265.82,2255.82) 1251.26,2241.26 ccw(c1268.8,2258.8) 1268.8,2234 ; v1@1246,2234 v1(1521,2234) ; v1@1251.26,2228.74 cw(c1263.97,2216.03) 1263.97,2234 ; U2.80@1518.88,2262.13 cw(c1514.17,2257.43) 1520.83,2257.43 cw(c1527.48,2257.43) U2.80@1522.78,2262.13 ; 1520.83,2254.97 cw(c1500.03,2254.97) 1514.74,2240.26 cw(c1499.61,2255.39) 1499.61,2234 cw(c1499.61,2212.61) 1514.74,2227.74 cw(c1499.61,2212.61) 1521,2212.61 cw(c1542.39,2212.61) v1@1527.26,2227.74 ; 1520.83,2255.8 ccw(c1542.8,2255.8) v1@1527.26,2240.26 ; U2.80@1520.83,2297.74 1520.83,2234.17 v1(1521,2234) ; v1@1602.7,1897.78 ccw(c1587.57,1882.65) 1587.57,1904.04 ccw(c1587.57,1925.43) v1@1602.7,1910.3 ; v1@1615.22,1897.78 cw(c1630.35,1882.65) 1630.35,1904.04 cw(c1630.35,1925.43) v1@1615.22,1910.3 ; U2.59@1642.7,1902.09 ccw(c1637.99,1897.39) 1637.99,1904.04 ccw(c1637.99,1910.69) U2.59@1642.7,1905.99 ; U2.59@1678.31,1904.04 v1(1608.96,1904.04) 1547.96,1904.04 1521,1931 v1(1521,2234)
  Bottom Layer w5.91: C4.2@1231.48,2291.48 cw(c1198.84,2258.84) 1245,2258.84 ; C4.2@1235.66,2295.66 cw(c1213.1,2273.1) 1245,2273.1 ; v1@1238.74,2241.26 ccw(c1223.61,2256.39) 1245,2256.39 ccw(c1266.39,2256.39) v1@1251.26,2241.26 ; C4.2@1240,2300 1245,2295 v1(1245,2235) ; 1245,2282.99 cw(c1257.01,2282.99) C4.2@1248.52,2291.48 ; C5.2@1511.48,2291.48 cw(c1488.5,2268.5) 1521,2268.5 ; v1@1514.74,2240.26 ccw(c1499.61,2255.39) 1521,2255.39 ccw(c1542.39,2255.39) v1@1527.26,2240.26 ; C5.2@1515.66,2295.66 cw(c1502.76,2282.76) 1521,2282.76 ; C5.2@1520,2300 1521,2299 v1(1521,2234) ; 1521,2273.33 cw(c1546.67,2273.33) C5.2@1528.52,2291.48 ; v1(1608.96,1904.04) 1675.96,1904.04 C6.2@1680,1900 ; v1@1615.22,1897.78 cw(c1630.35,1882.65) 1630.35,1904.04 cw(c1630.35,1925.43) v1@1615.22,1910.3 ; 1641.16,1904.04 cw(c1641.16,1861.16) C6.2@1671.48,1891.48 ; 1655.42,1904.04 cw(c1655.42,1875.42) C6.2@1675.66,1895.66 ; 1660.67,1904.04 ccw(c1660.67,1919.33) C6.2@1671.48,1908.52
  Bottom Layer w10: R3.2@1180,2300 C4.2@1240,2300 ; R3.2@1187.07,2292.93 cw(c1204.14,2275.86) 1204.14,2300 cw(c1204.14,2324.14) R3.2@1187.07,2307.07 ; C4.2@1232.93,2292.93 ccw(c1215.86,2275.86) 1215.86,2300 ccw(c1215.86,2324.14) C4.2@1232.93,2307.07
VCOM: P2.1 Q1.2 R27.1 | length 506
  Top Layer w10: Q1.2@3264.41,1374.81 P2.1@3264.41,1680.14 ; 3264.41,1406.74 ccw(c3294.48,1406.74) Q1.2@3273.22,1385.48
  Top Layer w31.5: Q1.2@3268.4,1370.82 3354.82,1370.82 ; 3333.74,1370.82 ccw(c3333.74,1424.26) R27.1@3371.53,1386.47 ; R27.1@3371,1387 3354.82,1370.82 ; R27.1@3371.75,1386.96 cw(c3354.82,1387.77) 3354.82,1370.82
VDD: P2.2 P2.3 | length 19.7
  Top Layer w10: P2.2@3264.41,1699.83 P2.3@3264.41,1719.51
VGH: C22.1 C26.1 D2.2 P2.29 R11.1 | length 1767.9
  Top Layer w10: P2.29@3264.41,2231.32 3419.32,2231.32
  Top Layer w20: C26.1@3044,2788 3431,2788 3502,2717 3502,2286 3447.32,2231.32 3419.32,2231.32
  Top Layer w31.5: R11.1@2684,2808 2744,2808 ; 2729.54,2808 ccw(c2729.54,2862.58) D2.2@2768.13,2823.99 ; 2744.14,2808.14 cw(c2770.22,2782.07) D2.2@2770.22,2818.94 ; D2.2@2767.53,2823.12 cw(c2744,2833.87) 2744,2808 ; 2886.22,2821.9 cw(c2886.22,2782.72) C22.1@2913.92,2810.42 ; 2892.97,2821.9 ccw(c2892.97,2851.53) C22.1@2913.92,2830.58 ; C22.1@2934.08,2810.42 cw(c2958.41,2786.09) 2958.41,2820.5 cw(c2958.41,2854.91) C22.1@2934.08,2830.58 ; C26.1@3044,2788 3011.5,2820.5 C22.1@2924,2820.5 2922.6,2821.9 D2.2@2784,2821.9 2757.9,2821.9 2744,2808
VGL: C35.2 C38.2 D6.1 P2.32 R32.1 | length 2448.5
  Top Layer w10: 3215,2290.38 P2.32@3264.41,2290.38
  Top Layer w20: C38.2@2254,3203 2187,3203 2148,3164 2148,2570 2215,2503 2966,2503 3178.62,2290.38 3215,2290.38
  Top Layer w31.5: C38.2@2254,3203 2292,3203 2319.5,3230.5 C35.2@2354,3230.5 2413.5,3230.5 2422.1,3221.9 D6.1@2469,3221.9 2535.1,3221.9 R32.1@2569,3188 ; 2302.25,3213.25 cw(c2327.61,3187.89) C35.2@2346.5,3218.38 ; C35.2@2343.92,3220.42 ccw(c2319.59,3196.09) 2319.59,3230.5 ccw(c2319.59,3264.91) C35.2@2343.92,3240.58 ; C35.2@2364.08,3220.42 cw(c2388.41,3196.09) 2388.41,3230.5 cw(c2388.41,3264.91) C35.2@2364.08,3240.58
VSYNC: PR1.6 U2.50 | length 315.2
  Top Layer w10: U2.50@1599.57,1667.82 1749.57,1667.82 1791.81,1625.57 PR1.6@1897.24,1625.57
pads on no net: JZ1.1 P1.6 P1.7 P1.8 P2.4 P2.30 P2.31 P2.34 P2.37 P2.38 P2.41 P2.42 S1.1 S1.4 S1.5 S1.6 U1.40 U4.1@3360,3380 U8.1 U9.1 U10.1
copper on no net:
  other v2: 125.87,86.24 234.13,86.24 3305.87,86.24 3414.13,86.24 71.73,180 288.27,180 3251.73,180 3468.27,180 125.87,273.76 234.13,273.76 3305.87,273.76 3414.13,273.76 125.87,3286.24 234.13,3286.24 3305.87,3286.24 3414.13,3286.24 71.73,3380 288.27,3380 3251.73,3380 3468.27,3380 125.87,3473.76 234.13,3473.76 3305.87,3473.76 3414.13,3473.76

## Polygon pours and split planes (outlines as drawn)
GND on Bottom Layer "KeepOutLayer-No Net" (solid, remove dead copper): -117,3637 -117,-171 520,-171 3765,-171 3765,79 3765,3689 3546,3689 -117,3689 -117,3637
GND on Top Layer "KeepOutLayer-No Net" (solid, remove dead copper): 71,1478 165,1478 174,1478 192,1460 211,1441 211,1371 211,1354 271,1294 285,1280 285,998 285,994 263,972 255,964 207,964 47,964 31,980 16,995 16,1066 16,1459 21,1464 35,1478 71,1478
GND on Top Layer "KeepOutLayer-No Net" (solid, remove dead copper): -65,3613 -69,3609 -69,2546 -69,2531 0,2462 58,2404 215,2404 231,2404 250,2423 281,2454 281,2552 281,2605 390,2714 409,2733 844,2733 1090,2733 1132,2775 1140,2783 1140,3587 1140,3599 1102,3637 1078,3613 -65,3613
GND on Top Layer "KeepOutLayer-No Net" (solid, remove dead copper): 1070,1093 1257,1093 1300,1050 1302,1048 1302,948 1302,568 1275,541 1260,526 1095,526 78,526 25,579 14,590 14,704 14,722 46,754 54,762 145,762 564,762 715,913 895,1093 1070,1093
GND on Top Layer "KeepOutLayer-No Net" (solid, remove dead copper): 1675,1385 1675,1064 1485,874 1358,747 1358,500 1358,125 1436,47 1483,0 1671,0 2827,0 2894,67 2942,115 2942,389 2942,413 3059,530 3091,562 3328,562 3392,562 3533,703 3533,1495 3533,1971 3512,1992 3508,1996 3398,1996 3331,1996 3322,1987 3309,1974 3309,1882 3309,1862 3295,1848 3293,1846 3261,1846 2765,1846 2744,1825 2429,1510 1802,1510 1800,1510 1675,1385
GND on Top Layer "KeepOutLayer-No Net" (solid, remove dead copper): 2044,3363 2044,3234 2044,2619 2152,2511 2174,2489 2690,2489 3223,2489 3299,2565 3308,2574 3308,2955 3308,3124 3163,3269 3009,3423 2286,3423 2104,3423 2044,3363

## Keep-outs
Keep-Out Layer:
  lines w10: 0,0 0,3543.31 3543.31,3543.31 3543.31,0 0,0

## Other copper
Top Layer:
  rectangle net VCC3.3: 3289,1483 3379,1548
  rectangle net VCC3.3: 2741,1687 2788,1727
  rectangle net VCC3.3: 2406,1452 2495,1536
  rectangle net VCC3.3: 1206,3430 1310,3516
  rectangle net VCC3.3: 402,688 502,784
  region net NetC25_1: 2529,2587 2577,2587 2610,2620 2610,2667 2631,2688 2689,2688 2709,2708 2709,2759 2694,2774 2584,2774 2563,2753 2563,2669 2529,2635
  region net NetC33_1: 2390,2590 2397,2583 2455,2583 2460,2588 2460,2658 2487,2685 2522,2685 2528,2691 2528,2745 2516,2757 2404,2757 2390,2743
  region net NetC37_2: 2551,3008 2594,2965 2664,2965 2675,2976 2675,3129 2652,3152 2559,3152 2551,3144
  region net NetR34_2: 2107,1225 2155,1225 2195,1265 2195,1324 2109,1324 2107,1322
  region net VCC5V: 1792,1469 1737,1414 1737,1227 1746,1218 1809,1218 1821,1230 2030,1230 2040,1240 2040,1351 2073,1384 2073,1449 2053,1469
  region net VCC5V: 2683,961 3049,961 3077,989 3077,1017 2986,1108 2986,1110 2952,1076 2758,1076 2668,986 2683,971
  region net NetQ1_1: 3067,1313 3120,1260 3200,1260 3213,1273 3213,1396 3204,1405 3138,1405 3121,1422 3072,1422 3067,1417
  region net SW: 2891,685 2979,597 3057,597 3093,633 3093,818.6 3053.6,858 3031.6,836 2987,836 2969,854 2969,924 2959,934 2895,934 2891,930
  region net NetC31_2: 3026,1129 3109,1046 3109,983 3118,974 3149,974 3156,981 3156,1047 3217,1047 3310,1140 3310,1177 3302,1185 3263,1185 3242,1164 3242,1147 3219,1124 3173,1124 3156,1141 3156,1171 3147,1180 3032,1180 3026,1174
  region net LED-: 3291,2349.43 3291,2348 3302,2337 3302,2304 3316,2290 3335,2290 3346,2301 3346,2364 3336,2374 3289,2374 3289,2352.43 3292,2349.43
  region net LED+: 3288,2453 3291,2456 3364,2456 3375,2445 3375,2412 3366,2403 3320.17,2403 3295,2428.17 3288,2428.17
  region net LED+: 2905,1466 2885,1466 2865,1486 2865,1541 2880,1556 2959,1556 2969,1546 2969,1510 2905,1446
  region net LED-: 2785,1614 2785,1649 2802,1666 2858,1666 2867,1657 2867,1622 2822,1577 2819,1577 2819,1580
Bottom Layer:
  rectangle net VCC3.3: 3289,1484 3379,1548
  rectangle net VCC3.3: 2396,1456 2492,1525
  rectangle net VCC3.3: 1206,3430 1310,3516
  region net SW: 2986,597 3066,597 3095,626 3061,660 2988,660 2978,650 2978,605
  region net VCC5V: 2921,1409 2930,1409 2959,1438 3029,1438 3033,1434 3033,1370 3015,1356 2978,1356

## Silkscreen, mask and mechanical layers (free items; w line width, h text height)
Top Overlay:
  lines w10: 986,3377 1307,3377
  text "LCD-TEST-V10" at 451,182 h80
Bottom Overlay:
  lines w10: 344,3137 912,3137 912,2551 244,2551 244,3137 350,3137
  text "QC" at 493,2815 h100

## Text inside footprints (layer, text, board x,y; h text height)
D1: Mechanical 1 "U1" at 2560.31,2787.17 h20 r180
D4: Mechanical 1 "U1" at 2400.31,2787.17 h20 r180
D5: Mechanical 1 "U1" at 2705.31,3187.17 h20 r180
P1: Top Overlay "10" at 133,1073 h50 r90; Top Overlay "9" at 233,1073 h50 r90; Top Overlay "1" at 233,533 h50 r90; Top Overlay "2" at 133,513 h50 r90
P2: Top Overlay "40" at 3221.1,2404.55 h20 r90; Top Overlay "1" at 3221.1,1670.3 h20 r90
Q1: Mechanical 1 "U1" at 3247.31,1436.17 h20 r180
U4: Mechanical 15 "1" at 3097.47,975.71 h20 r180
U6: Mechanical 15 "1" at 2068.47,1211.71 h20 r180